# Altium PCB SensorHub_V1_2.PcbDoc (part 2 of 2)
Units mm, origin at the board's own origin, x right, y up, seen from the top; angles counter-clockwise.
Board outline 62.99 x 68.83 mm, 4 copper layers (Top Layer, Int1, Int2, Bottom Layer), stack 1.369 mm thick; 108 components, 90 nets, 414 pads, 145 vias.
Unrouted connection lines stored in the file: 31.
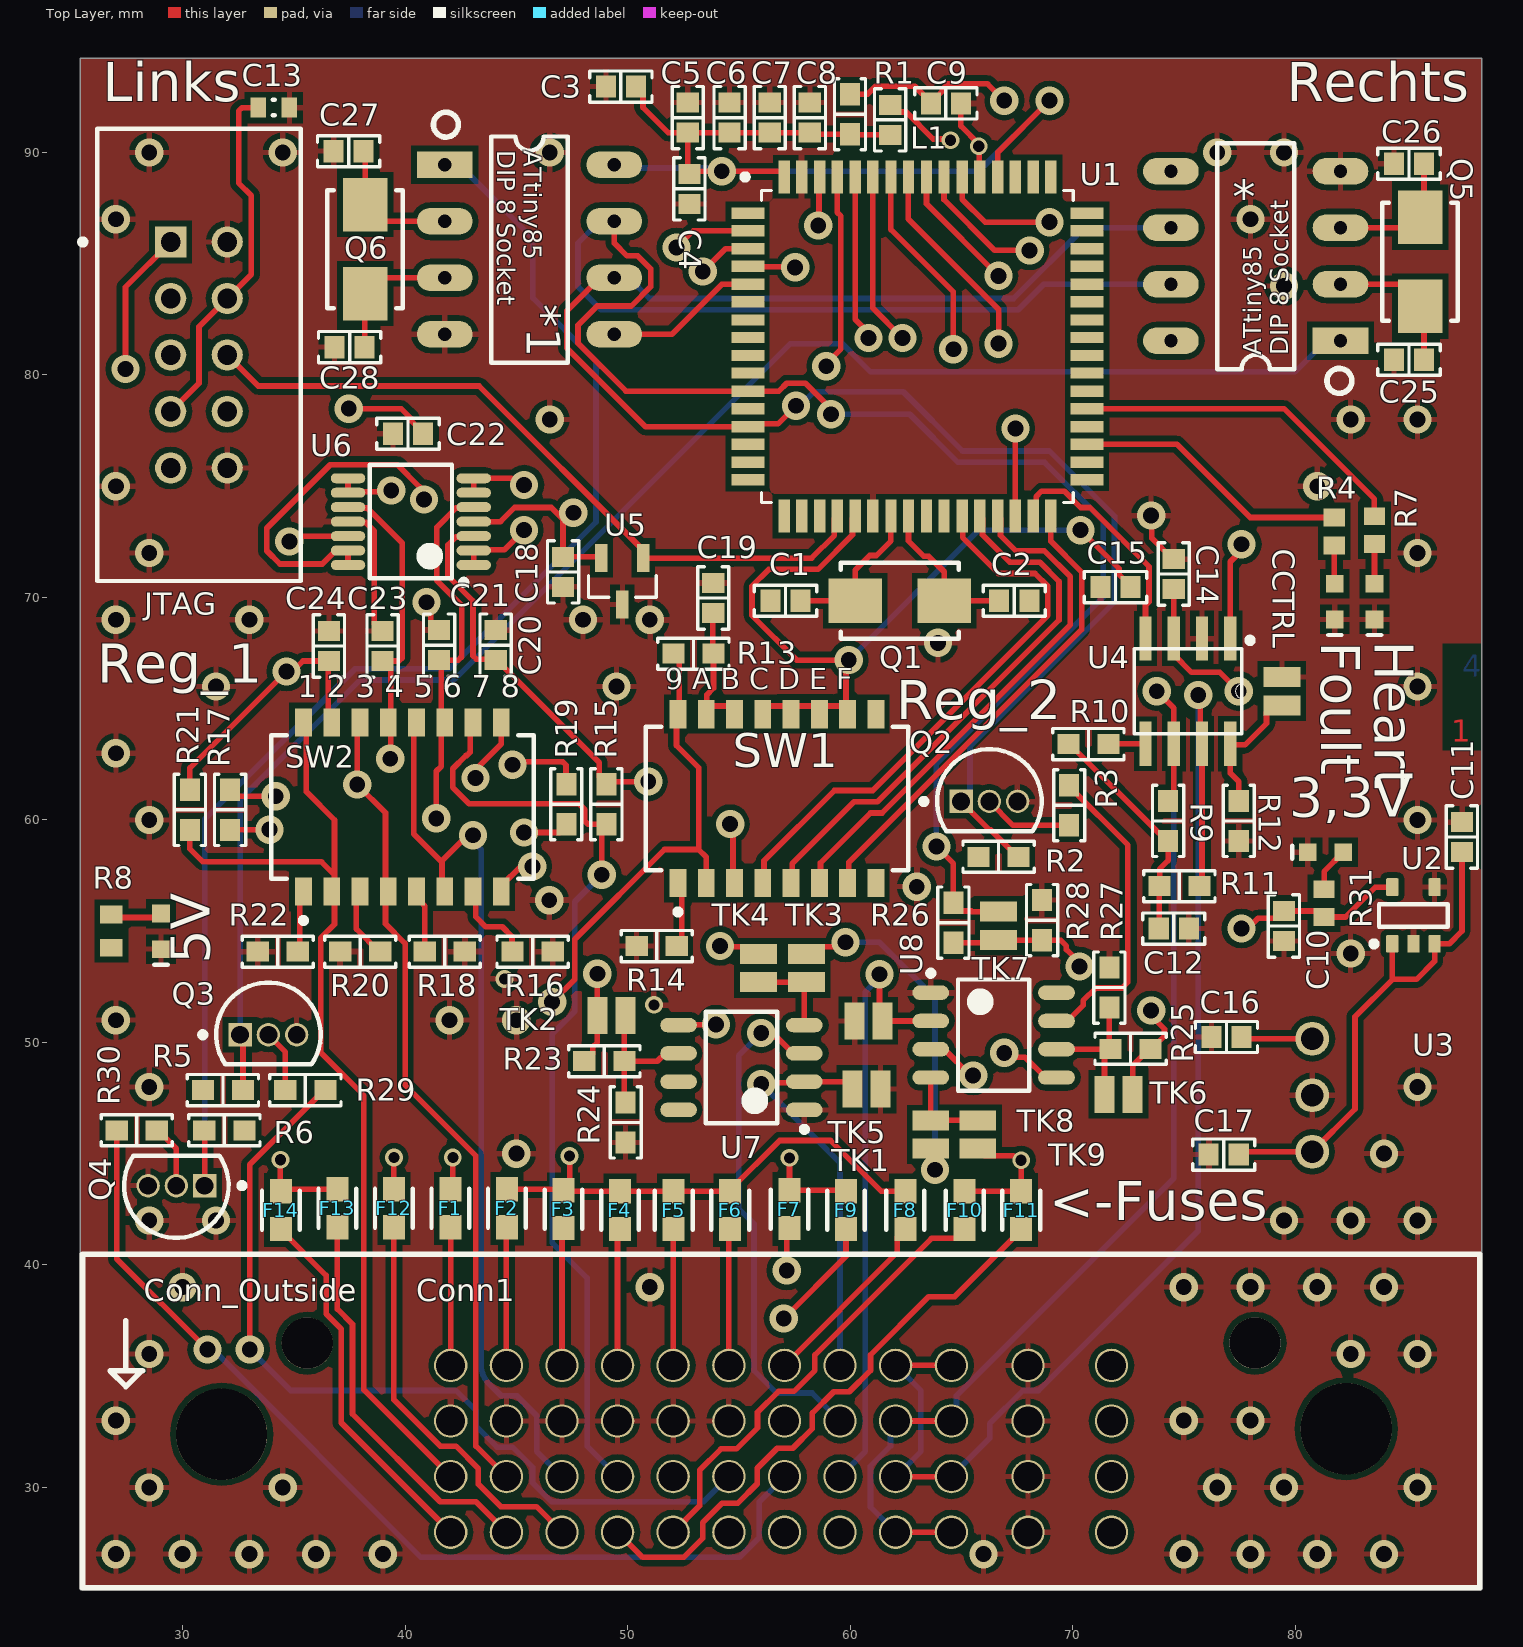
[diagram p0: Top Layer view]

## Silkscreen, mask and mechanical layers (free items; w line width, h text height) (continued)
Top Overlay: (continued)
  text "Reg_1" at 26.162,65.586 h3
  text "9 A B C D E F" at 51.689,65.549 h1.6
  text "1 2 3 4 5 6 7 8" at 35.179,65.169 h1.7
  text "Reg_2" at 62.086,63.931 h3
  text "<-Fuses" at 68.961,41.432 h3
Bottom Overlay:
  text "Die Register 1 und 2 / lesen sich von links nach rechts 1-16" at 63.119,90.551 h2
  text "NTC | 1 1 / 12V | 1 0 / Def | 0 1" at 55.753,82.042 h2
  text "Baltic Racing / LukasDeeken / Sensorhub V1.3 / 10.2020" at 84.328,57.531 h2
  text "A_IN0 -> 1,2 / A_IN1 -> 3,4 / A_IN2 -> 5,6 / A_IN3 -> 7,8 /  / A_IN4 -> 9,A / JTAG_TCK_EN -> B / CANID_0 -> C /  / CANID_1 -> D / CANID_2 -> E / CANID_3 -> F" at 63.627,54.102 h2
Board Outline:
  the board outline again, w0.254

## Text inside footprints (layer, text, board x,y; h text height)
*: Top Overlay "ATtiny85  / DIP 8 Socket" at 79.692,80.884 h0.8 r90
*1: Top Overlay "ATtiny85  / DIP 8 Socket" at 44.133,90.099 h0.8 r270
Conn1: Top Overlay "Conn_Outside" at 28.254,38.356 h1